# EAGLE board atom-hub-proto-self-template-board-outline (EAGLE 7.7.0)
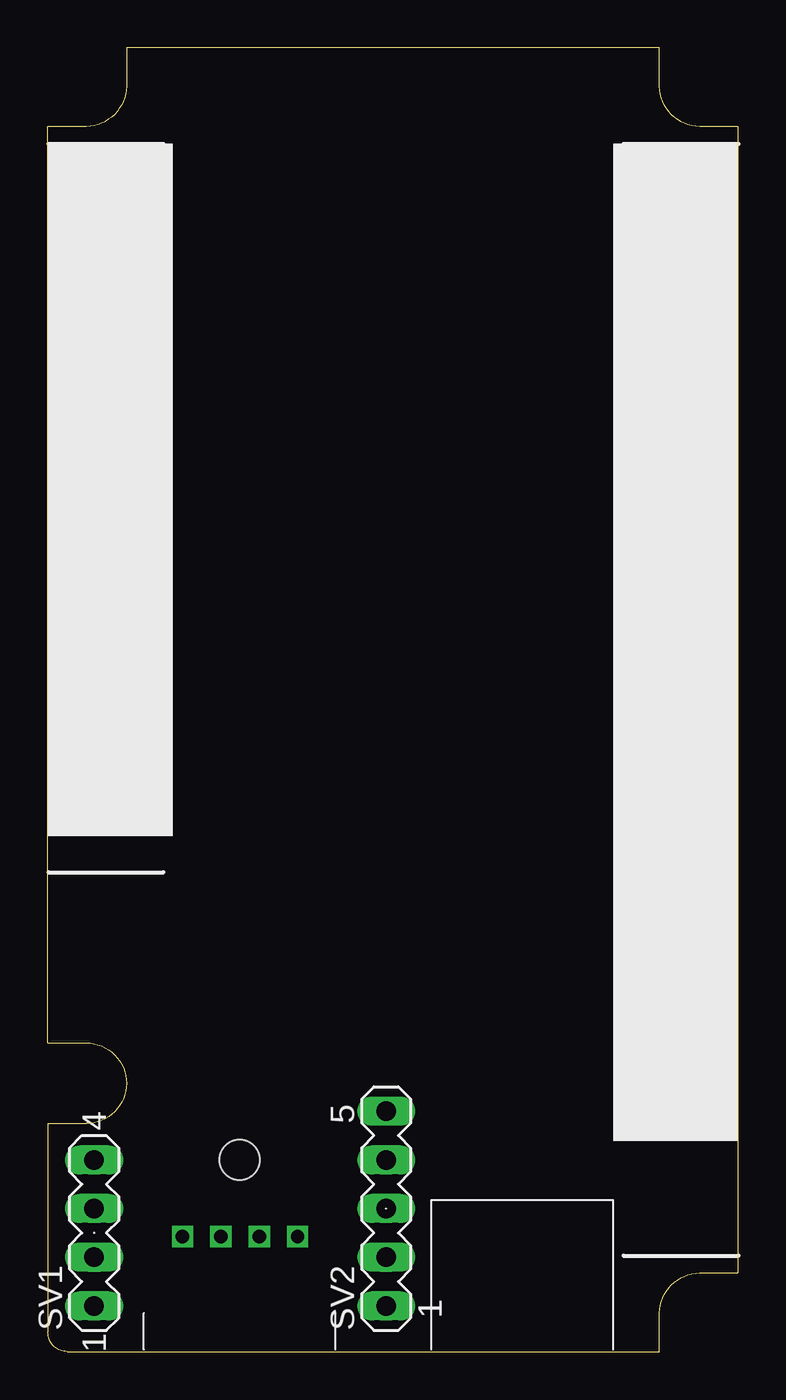
[diagram p0: board, top side]
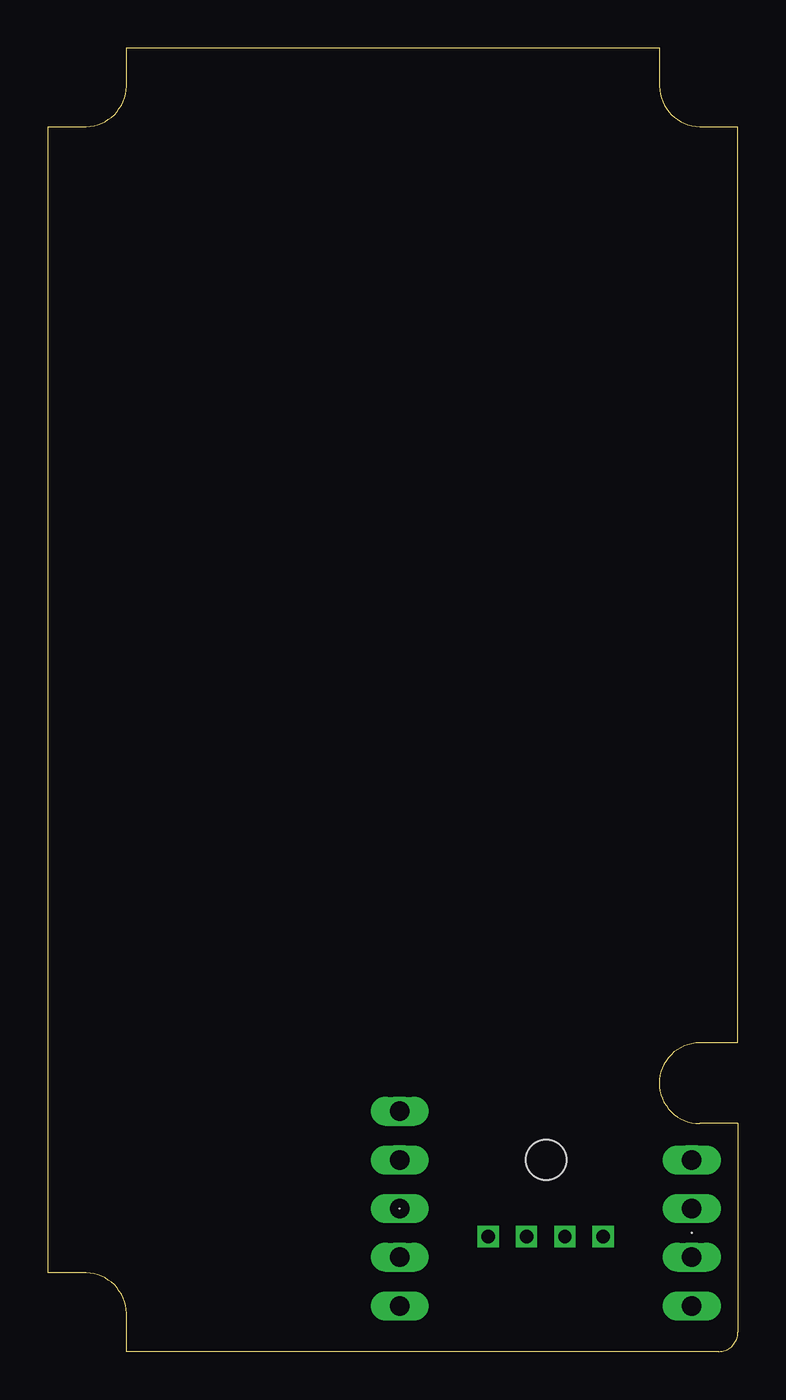
[diagram p1: board, bottom side, seen from below]

Size 36 x 68 mm. Coordinates in mm from the lower left corner, seen from the top.
Outline: 1,0 31.9,0 31.9,2 arc-87 34,4.1 36,4.1 36,63.9 34,63.9 arc-87 31.9,66 31.9,68 4.1,68 4.1,66 arc-87 2,63.9 0,63.9 0,16.1 2,16.1 arc-180 2,11.9 0,11.9 0,1 arc90 1,0
Copper layers (1*16): Top 0.035mm / dielectric 1.5mm / Bottom 0.035mm
Design rules "default": minimum track width 10mil, minimum drill 0.6mm, track to track 8mil, track to pad 8mil, pad to pad 8mil, via to via 8mil, smd to smd 8mil, copper to edge 40mil, drill to drill 8mil, minimum pad ring 10mil, minimum via ring 8mil, stop-mask expansion 4mil, vias tented up to drill 0mil, thermal gap 10mil
Net classes: 0 default: width 0.15 mm, drill 0.3 mm, clearance 0.15 mm
Holes 2.1 mm at 10,10
Holes 0 mm at 2.41,6.19 17.65,7.46
bRestrict: area 9,9 to 11.1,11
vRestrict: area 9,9 to 11,11; 28 lines

## Footprints (pad centres in the part's own frame; a part is rotated, then mirrored left to right if it is on the bottom)
MA04-1 = drill 1.016 long: 1 -3.81,0; 2 -1.27,0; 3 1.27,0; 4 3.81,0
MA05-1 = drill 1.016 long: 1 -5.08,0; 2 -2.54,0; 3 0,0; 4 2.54,0; 5 5.08,0

## Placement (x,y rotation side)
SV1  [MA04-1]  2.41,6.19 90 top
SV2  [MA05-1]  17.65,7.46 90 top

## Library data of the parts
SV1 SV2 = con-lstb; OC_FARNELL: unknown; OC_NEWARK: unknown

## Tracks (layer width: path | path; a pad name or v marks a point on that pad's centre or on a via)
3V3  (via drill 1)
  other vias: 17.65,12.54
+5V  (via drill 1)
  other vias: 2.41,4.92
G19  (via drill 1)
  other vias: 17.65,7.46
G22  (via drill 1)
  other vias: 17.65,10
G23  (via drill 1)
  other vias: 17.65,4.92
G33  (via drill 1)
  other vias: 17.65,2.38
GND  (via drill 1)
  other vias: 2.41,2.38
  pour Bottom: 0,1 1,0 31.7,0 31.9,0.2 32.2,0.2 36,4 36,27.1 35.5,27.6 6.9,27.6 6.7,27.4 6.7,45.9 6.3,46.3 6.2,46.4 0,46.4
N$2  (via drill 0.7)
  other vias: 13.03,6
N$3  (via drill 0.7)
  other vias: 11.03,6
N$4  (via drill 0.7)
  other vias: 9.03,6
N$5  (via drill 0.7)
  other vias: 7.03,6
SCLG21  (via drill 1)
  other vias: 2.41,10
SDAG25  (via drill 1)
  other vias: 2.41,7.46

## Text on the board
Document: Add: MA04-1 ( con-lstb ) MA05-1 ( con-lstb )